# Altium PCB 1x9x1.PcbDoc (part 1 of 2)
Units mil, origin at the board's own origin, x right, y up, seen from the top; angles counter-clockwise.
Board outline 2200 x 5400 mil, 4 copper layers (Top Layer, Mid-Layer 1, Mid-Layer 2, Bottom Layer), stack 43.512 mil thick; 41 components, 51 nets, 356 pads, 603 vias.
Unrouted connection lines stored in the file: 1.
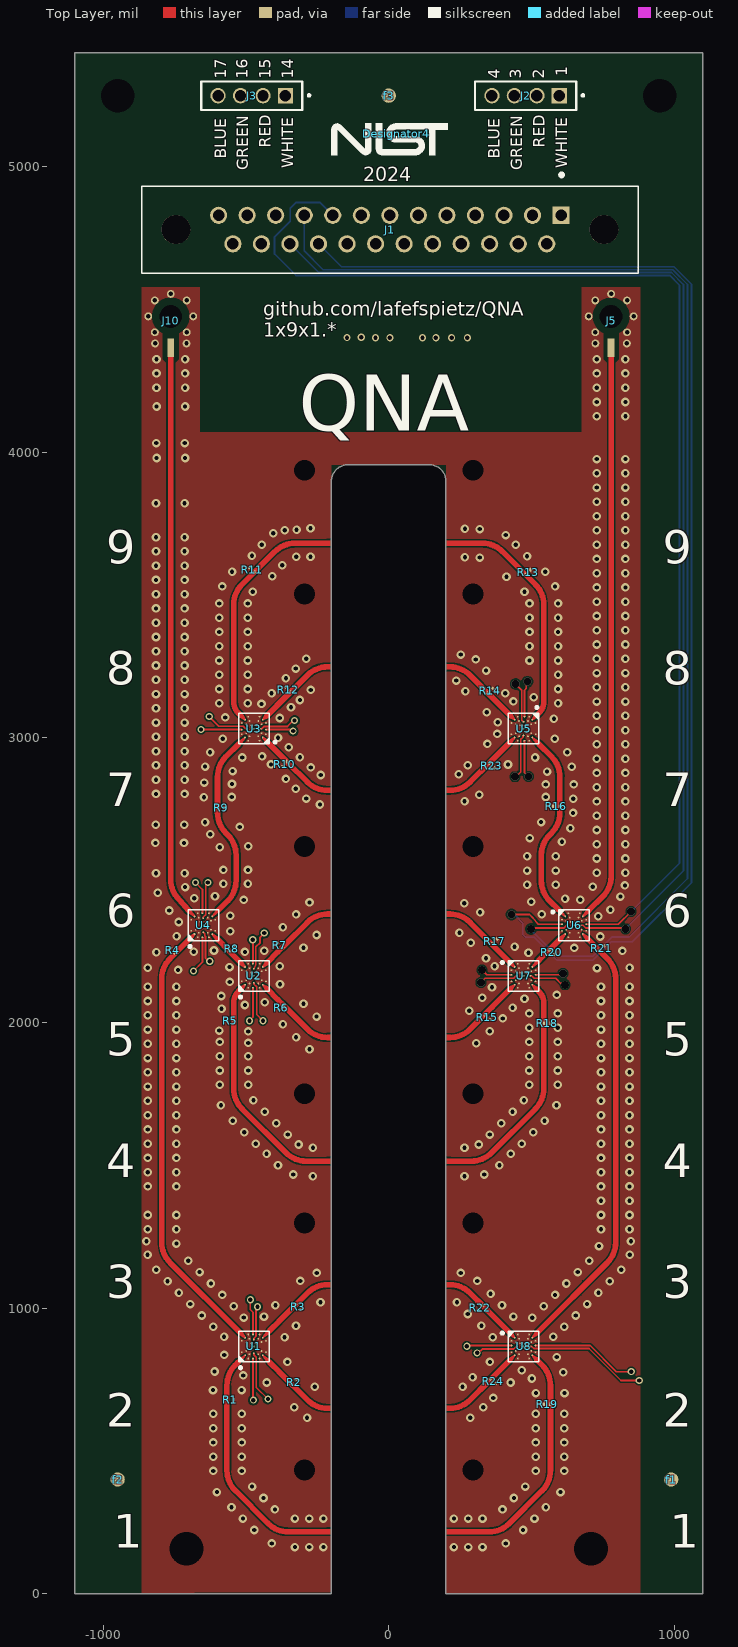
[diagram p0: Top Layer view]
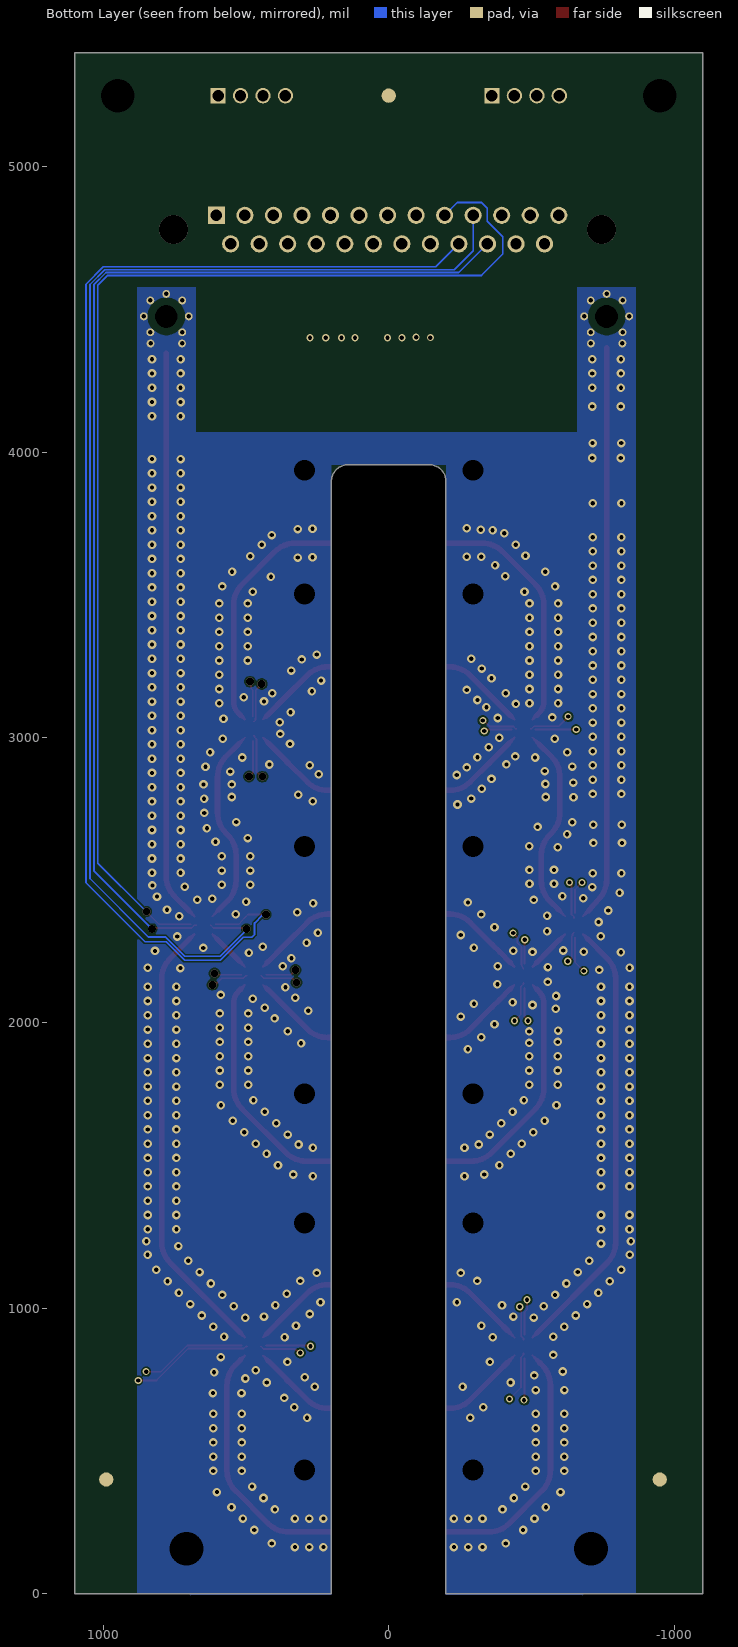
[diagram p1: Bottom Layer view, seen from below]
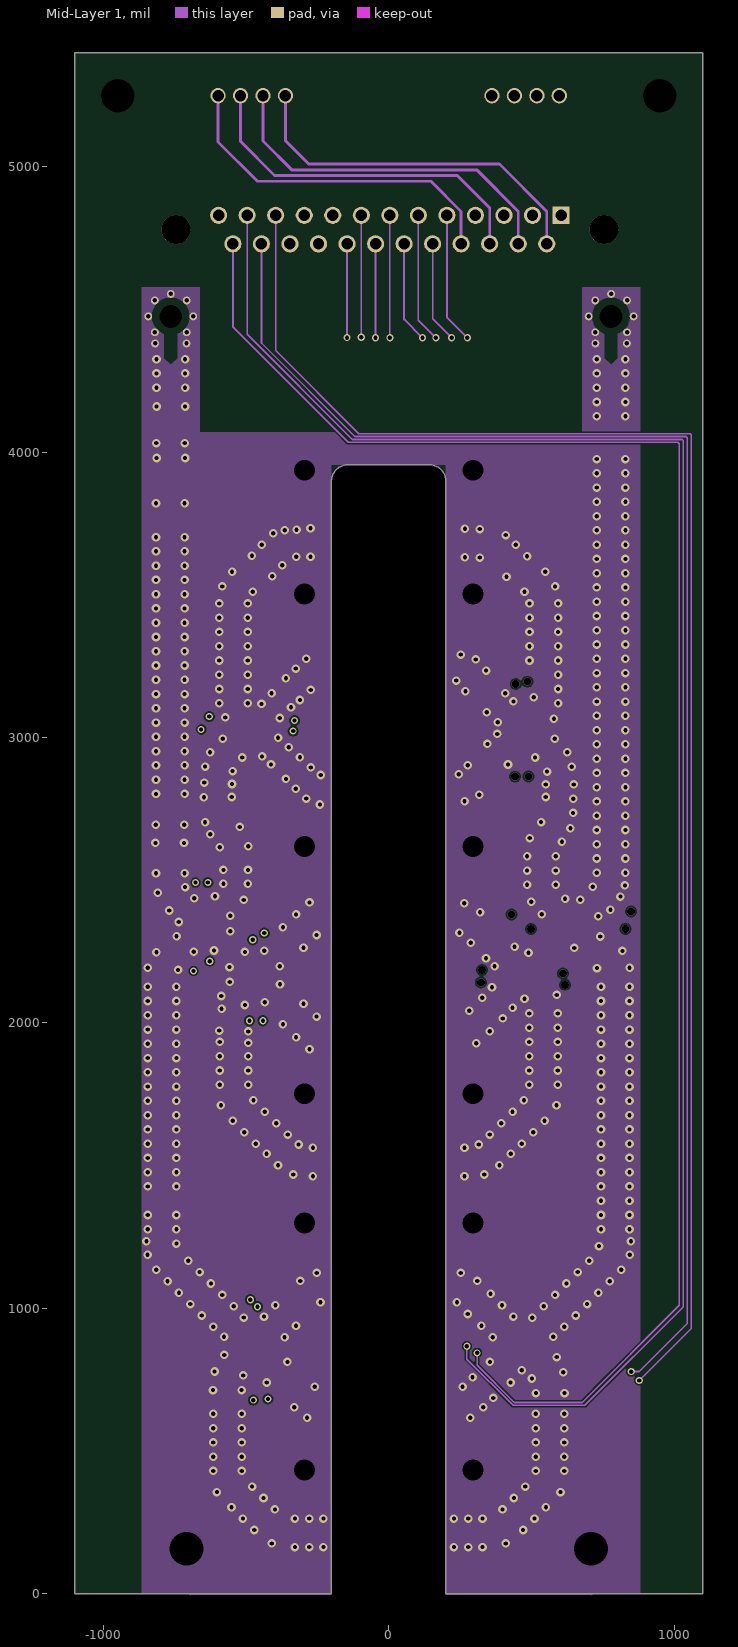
[diagram p2: Mid-Layer 1]
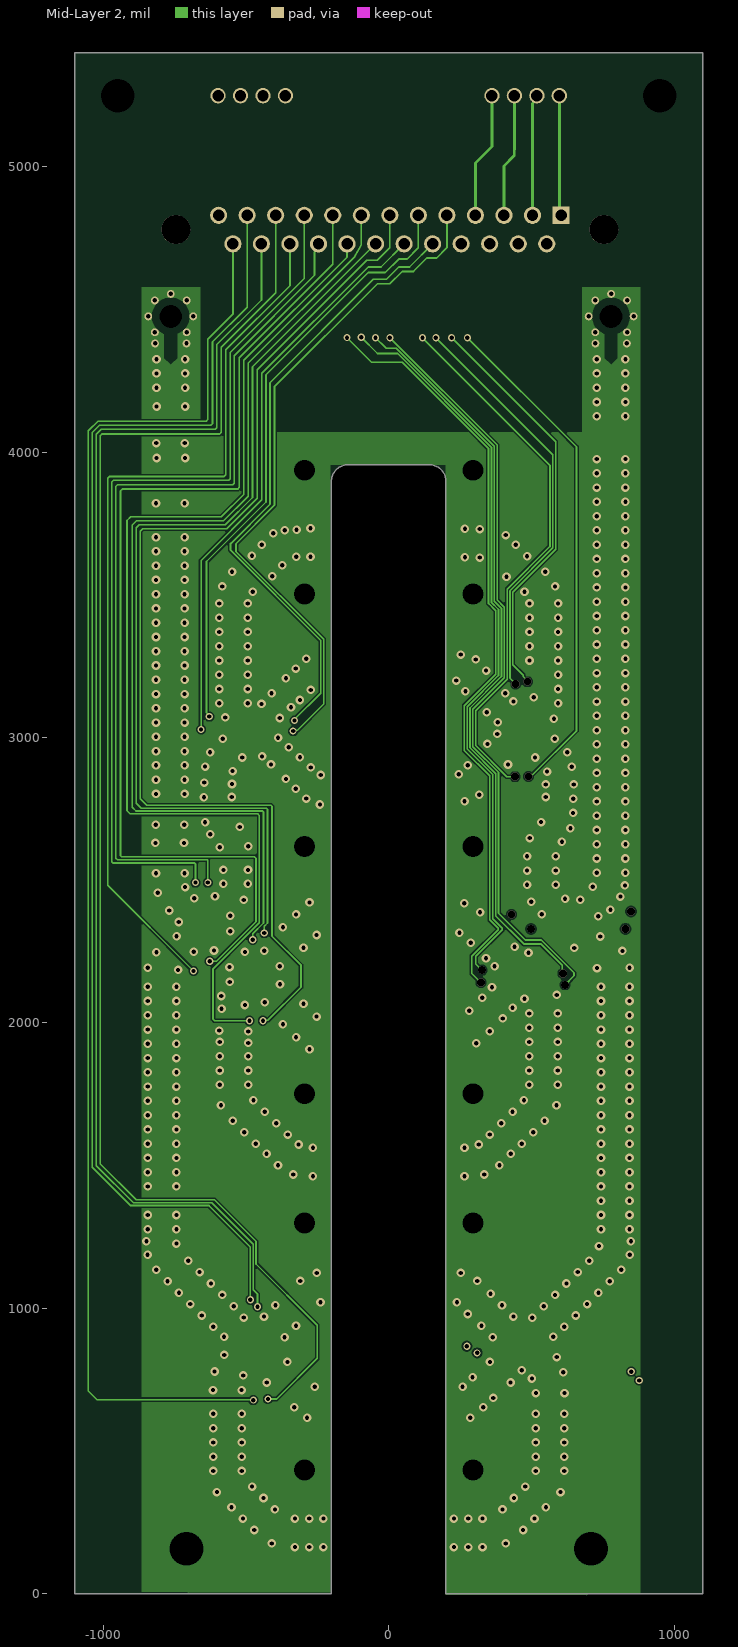
[diagram p3: Mid-Layer 2]

## Layer stack, top to bottom
Top Solder: solder mask 1, SM-001, Dk 4
Top Layer: signal copper 1.378
Core1: dielectric 10, RO4350B, Dk 3.48
Mid-Layer 1: signal copper 1.378
Dielectric 1: prepreg 7, PR7628, Dk 4.24
Dielectric 2: prepreg 4, PR2116, Dk 4.17
Dielectric 3: prepreg 7, PR7628, Dk 4.24
Mid-Layer 2: signal copper 1.378
Core2: dielectric 10, RO-4350B, Dk 3.48
Bottom Layer: signal copper 1.378
Bottom Solder: solder mask 1, SM-001, Dk 4

## Board outline
-1100,0 -1100,5400 1100,5400 1100,0 200.79,0 200.79,3897.64 ccw(c141.73,3897.64) 141.73,3956.69 -141.73,3956.69 ccw(c-141.73,3897.64) -200.79,3897.64 -200.79,0

## Design rules (kind name [scope] priority, off if disabled: settings)
Clearance [All] p1: gap=10 ignorepadtopadclearanceinfootprint=FALSE except(3.74: Track-Region SMDPad-Region Region-Region; 3.94: Track-Track Track-SMDPad; 4: Track-Fill; 6: Arc-SMDPad Arc-THPad Arc-Poly Track-Poly SMDPad-SMDPad SMDPad-Poly THPad-Poly Via-Poly Fill-Poly Poly-Poly Poly-Region Poly-Hole)
HoleSize [All] p1: absolutevalues=TRUE maxlimit=250 minlimit=1 maxpercent=80.000 minpercent=20.000
PolygonConnect [All] p1: connectstyle=Direct reliefconductorwidth=10 reliefentries=4 polygonreliefangle="90 Angle" airgapwidth=10
RoutingCorners [All] p1: cornerstyle=45-Degree minsetback=196.85 maxsetback=196.85
RoutingVias [All] p1: holewidth=15 width=25 viastyle="Through Hole" minholewidth=5 minwidth=10 maxholewidth=28 maxwidth=50
SolderMaskExpansion [All] p1: expansion=4 istentingtop=FALSE
Width [All] p1 off: maxlimit=21.65 minlimit=3.94 preferedwidth=10 toplayer_prefwidth=6 midlayer1_minwidth=10 midlayer1_maxwidth=10 midlayer2_minwidth=10 midlayer2_maxwidth=10 bottomlayer_minwidth=10 bottomlayer_maxwidth=10 minimp=50.000000 maximp=50.000000 favimp=50.000000
Width cpw-Z-1 [All] p2 off: maxlimit=19.68 minlimit=6.87 preferedwidth=10 toplayer_minwidth=12.7 toplayer_prefwidth=15.98 impedanceprofiledriven=TRUE impedanceprofileid={FF6547F1-1ACB-4B88-A69B-03F59FE56022} minimp=50.000000 maximp=50.000000 favimp=50.000000
28 further rules are at their usual default settings.

## Classes and differential pairs
component class 1x9x1: J1 J2 J3
component class 1x9x1_3: J5 R13 R14 R15 R16 R17 R18 R19 R20 R21 R22 R23 R24 U5 U6 U7 U8
component class 1x9x1_2: f1 f2 f3 J10 R1 R2 R3 R4 R5 R6 R7 R8 R9 R10 R11 R12 U1 U2 U3 U4

## Components (designator, comment, footprint, x,y, rotation, side; value= is the part's Value field where it differs from the comment)
Designator4 "Comment" "NIST logo - TopOverlay" 26.37,5117.13 r0 top
f1 "Fiducial" fiducial#1 1015,405 r0 top
f2 "Fiducial" fiducial#2 -950,400 r90 top
f3 "Fiducial" fiducial#2 0,5250 r0 top
J1 "M83513/25-D01CP" BEL_M83513/25-D01CP 3.94,4780.71 r0 top
J2 "2mm-header" 2mm-header 480,5250 r180 top
J3 "2mm-header" 2mm-header -480,5250 r180 top
J5 "85305-0232" MOLEX_85305-0232 779.53,4476.38 r0 top
J10 "85305-0232" MOLEX_85305-0232 -763.78,4476.38 r0 top
R1 "TE connectivity CPF0201B56K2E1" 0201-resistor -554.81,680 r180 top value=56k
R2 "TE connectivity CPF0201B56K2E1" 0201-resistor -331.35,741.65 r45 top value=56k
R3 "TE connectivity CPF0201B56K2E1" 0201-resistor -316.35,1005.35 r135 top value=56k
R4 "TE connectivity CPF0201B56K2E1" 0201-resistor -757,2254 r315 top value=56k
R5 "TE connectivity CPF0201B56K2E1" 0201-resistor -555.19,2007 r0 top value=56k
R6 "TE connectivity CPF0201B56K2E1" 0201-resistor -376.65,2053.35 r45 top value=56k
R7 "TE connectivity CPF0201B56K2E1" 0201-resistor -381.65,2271.65 r135 top value=56k
R8 "TE connectivity CPF0201B56K2E1" 0201-resistor -550.35,2260.65 r45 top value=56k
R9 "TE connectivity CPF0201B56K2E1" 0201-resistor -586.81,2755 r0 top value=56k
R10 "TE connectivity CPF0201B56K2E1" 0201-resistor -364.53,2906.88 r45 top value=56k
R11 "TE connectivity CPF0201B56K2E1" 0201-resistor -479,3588 r315 top value=56k
R12 "TE connectivity CPF0201B56K2E1" 0201-resistor -352.65,3168.65 r135 top value=56k
R13 "TE connectivity CPF0201B56K2E1" 0201-resistor 489,3580 r225 top value=56k
R14 "TE connectivity CPF0201B56K2E1" 0201-resistor 356.65,3163.65 r45 top value=56k
R15 "TE connectivity CPF0201B56K2E1" 0201-resistor 346,2020 r315 top value=56k
R16 "TE connectivity CPF0201B56K2E1" 0201-resistor 588,2760 r0 top value=56k
R17 "TE connectivity CPF0201B56K2E1" 0201-resistor 371.57,2286.43 r225 top value=56k
R18 "TE connectivity CPF0201B56K2E1" 0201-resistor 556.19,1999 r180 top value=56k
R19 "TE connectivity CPF0201B56K2E1" 0201-resistor 554.81,664 r0 top value=56k
R20 "TE connectivity CPF0201B56K2E1" 0201-resistor 571.34,2247.55 r315 top value=56k
R21 "TE connectivity CPF0201B56K2E1" 0201-resistor 746,2262 r45 top value=56k
R22 "TE connectivity CPF0201B56K2E1" 0201-resistor 321.35,1002.35 r45 top value=56k
R23 "TE connectivity CPF0201B56K2E1" 0201-resistor 362,2902 r135 top value=56k
R24 "TE connectivity CPF0201B56K2E1" 0201-resistor 366.14,744.09 r135 top value=56k
U1 "MM5130*" MM5130-NORM_PCB_NOFLOOD -472.44,866.14 r90 top
U2 "MM5130*" MM5130-NORM_PCB_NOFLOOD -472.44,2165.35 r90 top
U3 "MM5130*" MM5130-NORM_PCB_NOFLOOD -472.44,3031.5 r180 top
U4 "MM5130*" MM5130-NORM_PCB_NOFLOOD -649.61,2342.52 r90 top
U5 "MM5130*" MM5130-NORM_PCB_NOFLOOD 472.44,3031.5 r270 top
U6 "MM5130*" MM5130-NORM_PCB_NOFLOOD 649.61,2342.52 r0 top
U7 "MM5130*" MM5130-NORM_PCB_NOFLOOD 472.44,2165.35 r0 top
U8 "MM5130*" MM5130-NORM_PCB_NOFLOOD 472.44,866.14 r0 top

## Footprints (in the part's own frame and the unit in brackets; to place one, negate y for a bottom-side part, rotate by r counter-clockwise, add the part's x,y. Pads: shape width x height; smd on the part's side, far side on the other; paste and mask are expansions set on the pad)
2mm-header [mm]
  rect 1.37x1.37 / inner round 1.37 / far side rect 1.37x1.37 hole 1.02: 01(-3,0)
  round 1.37 hole 1.02: 02(-1,0) 03(1,0) 04(3,0)
  silkscreen extent -5.2,-1.27 4.5,1.27, body extent -4.34,-1.61 4.34,1.61, height 7.15
0201-resistor [mm]
  rect 0.25x0.3 smd: 1(-0.3,0) 2(0.3,0)
BEL_M83513/25-D01CP [mm]
  rect 1.53x1.53 hole 1.02: 1(15.24,1.27)
  round 1.53 hole 1.02: 2(12.7,1.27) 3(10.16,1.27) 4(7.62,1.27) 5(5.08,1.27) 6(2.54,1.27) 7(0,1.27) 8(-2.54,1.27) 9(-5.08,1.27) 10(-7.62,1.27) 11(-10.16,1.27) 12(-12.7,1.27) 13(-15.24,1.27) 14(13.97,-1.27) 15(11.43,-1.27) 16(8.89,-1.27) 17(6.35,-1.27) 18(3.81,-1.27) 19(1.27,-1.27) 20(-1.27,-1.27) 21(-3.81,-1.27) 22(-6.35,-1.27) 23(-8.89,-1.27) 24(-11.43,-1.27) 25(-13.97,-1.27)
  round 2.57 hole 2.57 unplated: ""(-19.05,0) ""(19.05,0)
  silkscreen extent -22.1,-3.88 22.1,5.01
fiducial#1 [mil]
  round 50 / inner round 0 / far side round 50 all layers, no hole paste-99999 mask+50: 1(-25,-5)
fiducial#2 [mil]
  round 50 / inner round 0 / far side round 50 all layers, no hole paste-99999 mask+50: 1(0,0)
MM5130-NORM_PCB_NOFLOOD [mm]
  round 0.15 smd mask+0.025: 1(-1.072,0.5) 2(-1.072,0.084) 3(-1.072,-0.5) 4(-0.786,-0.786) 5(-0.5,-1.072) 6(0.5,-1.072) 7(0.786,-0.786) 8(1.072,-0.5) 9(1.072,0.084) 10(1.072,0.5) 11(0.786,0.786) 12(0.5,1.072) 13(-0.5,1.072) 14(-0.786,0.786) 15(-0.681,0.396) 16(-0.615,0) 17(-0.681,-0.396) 18(-0.396,-0.681) 19(0.396,-0.681) 20(0.681,-0.396) 21(0.615,0) 22(0.681,0.396) 23(0.396,0.681) 24(-0.396,0.681) 25(-0.295,0.29) 26(-0.295,-0.29) 27(0.295,-0.29) 28(0.295,0.29) 29(0,0)
  silkscreen extent -1.99,-1.36 1.36,1.36, body extent -1.27,-1.27 1.27,1.27, height 0.98
MOLEX_85305-0232 [mm]
  rect 0.61x1.651 smd: 1(0,-2.775)
  round 0.7 hole 0.4 mask+0: gnd(-2,0) gnd(-1.414,-1.414) gnd(-1.414,1.414) gnd(-1.4,-2.41) gnd(0,2) gnd(1.4,-2.41) gnd(1.414,-1.414) gnd(1.414,1.414) gnd(2,0)
  body extent -2.5,-3.5 2.5,2.5, height 4.06
"NIST logo - TopOverlay" [mil]
  silkscreen extent -227,-76 181,35

## Part data
J1: "MIL-DTL-83513 PCB Mounted Connector", Package=None, Availability=Unavailable, MP=M83513/25-D01CP, Price=None
J2 J3: "<a href=\"https://pricing.snapeda.com/parts/TSW-104-07-G-S/Samtec/view-part?ref=eda\">Check availability</a>", Package=None, Availability=Unavailable, MP=altium_native_batch, Price=None
J5 J10: "SMP Connector Plug, Male Pin 50Ohm Surface Mount Solder", Package=None, Availability="In Stock", Check_prices=https://www.snapeda.com/parts/853050232/Molex/view-part/?ref=eda, MF=Molex, MP=853050232, Price=None, Purchase-URL=https://pricing.snapeda.com/search/part/853050232/?ref=eda, SnapEDA_Link=https://www.snapeda.com/parts/853050232/Molex/view-part/?ref=snap
R1 R2 R3 R4 R5 R6 R7 R8 R9 R10 R11 R12 R13 R14 R15 R16 R17 R18 R19 R20 R21 R22 R23 R24: "CPF 0201 56K2 0.1% 25PPM 1K RL", Mfgr Part No.=CPF0201B56K2E1, Package=None, Availability=Unavailable, Mfgr="TE connectivity", MP=ERJ1GN0R00C, Price=None
U1 U2 U3 U4 U5 U6 U7 U8: library part IC-MM5130, "High power SP4T MEMs switch"

## Free pads (board coordinates)
  round 60 hole 118.11: 9(-950,5250) 9(-708.66,157.48) 9(708.66,157.48) 9(950,5250)
  round 60 hole 73: 9(-295.28,433.07) 9(-295.28,1299.21) 9(-295.28,1751.97) 9(-295.28,2618.11) 9(-295.28,3503.94) 9(-295.28,3937.01) 9(295.28,433.07) 9(295.28,1299.21) 9(295.28,1751.97) 9(295.28,2618.11) 9(295.28,3503.94) 9(295.28,3937.01)
  round 0 hole 80 unplated: ""(-763.78,4476.38) ""(779.53,4476.38)

## Via types
v1: diameter 30, hole 15, Top Layer to Bottom Layer, 563 vias
v2: diameter 25, hole 15, Top Layer to Bottom Layer, 28 vias
v3: diameter 28, hole 28, Top Layer to Bottom Layer, 12 vias

## Nets (pads, with @x,y where several pads share a name; then routed paths per layer and width w, separated by ;. In a path a pad name is that pad's centre, name@x,y a point inside that pad or via, vN(x,y) a via of type N, cw(c..) or ccw(c..) an arc to the next point about the centre after c; other vN are vias at no path point)
GND: J5.gnd J10.gnd pad.9@295.28,433.07 pad.9@295.28,1299.21 pad.9@295.28,1751.97 pad.9@295.28,2618.11 pad.9@295.28,3503.94 pad.9@295.28,3937.01 pad.9@708.66,157.48 pad.9@-295.28,433.07 pad.9@-295.28,1299.21 pad.9@-295.28,1751.97 pad.9@-295.28,2618.11 pad.9@-295.28,3503.94 pad.9@-295.28,3937.01 pad.9@-708.66,157.48 pad.@-763.78,4476.38 R1.1 R2.2 R3.1 R4.1 R5.1 R6.1 R7.2 R8.2 R9.2 R10.1 R11.1 R12.2 R13.1 R14.2 R15.2 R16.1 R17.1 R18.1 R19.1 R20.2 R21.2 R22.1 R23.1 R24.1 U1.1 U1.3 U1.5 U1.6 U1.8 U1.10 U1.12 U1.13 U1.15 U1.17 U1.18 U1.19 U1.20 U1.22 U1.23 U1.24 U1.25 U1.26 U1.27 U1.28 U2.1 U2.3 U2.5 U2.6 U2.8 U2.10 U2.12 U2.13 U2.15 U2.17 U2.18 U2.19 U2.20 U2.22 U2.23 U2.24 U2.25 U2.26 U2.27 U2.28 U3.1 U3.3 U3.5 U3.6 U3.8 U3.10 U3.12 U3.13 U3.15 U3.17 U3.18 U3.19 U3.20 U3.22 U3.23 U3.24 U3.25 U3.26 U3.27 U3.28 U4.1 U4.3 U4.5 U4.6 U4.8 U4.10 U4.12 U4.13 U4.15 U4.17 U4.18 U4.19 U4.20 U4.22 U4.23 U4.24 U4.25 U4.26 U4.27 U4.28 U5.1 U5.3 U5.5 U5.6 U5.8 U5.10 U5.12 U5.13 U5.15 U5.17 U5.18 U5.19 U5.20 U5.22 U5.23 U5.24 U5.25 U5.26 U5.27 U5.28 U6.1 U6.3 U6.5 U6.6 U6.8 U6.10 U6.12 U6.13 U6.15 U6.17 U6.18 U6.19 U6.20 U6.22 U6.23 U6.24 U6.25 U6.26 U6.27 U6.28 U7.1 U7.3 U7.5 U7.6 U7.8 U7.10 U7.12 U7.13 U7.15 U7.17 U7.18 U7.19 U7.20 U7.22 U7.23 U7.24 U7.25 U7.26 U7.27 U7.28 U8.1 U8.3 U8.5 U8.6 U8.8 U8.10 U8.12 U8.13 U8.15 U8.17 U8.18 U8.19 U8.20 U8.22 U8.23 U8.24 U8.25 U8.26 U8.27 U8.28
  other v1: -328.68,163.07 -278.68,163.07 -228.68,163.07 228.68,163.07 278.68,163.07 328.68,163.07 -410,176 410,176 -471,223 471,223 -511,263 511,263 -328.68,263.07 -278.68,263.07 -228.68,263.07 228.68,263.07 278.68,263.07 328.68,263.07 -398.88,295.12 398.88,295.12 -551,303 551,303 -438.88,335.12 438.88,335.12 -602,356 602,356 -478.88,375.12 478.88,375.12 -615,430 -515,430 515,430 615,430 -615,480 -515,480 515,480 615,480 -615,530 -515,530 515,530 615,530 -615,580 -515,580 515,580 615,580 -286,616 286,616 -615,630 -515,630 515,630 615,630 -331,653 331,653 366,686 516,703 616,703 -615.75,713.39 -515.75,713.39 -258.88,725.12 258.88,725.12 -427,740 427,740 502,754 293.88,758.12 -509.84,764.76 612,776 -610.24,778.54 466,783 -354.88,812.12 354.88,812.12 589,829 -576.77,836.61 -364.88,898.88 364.88,898.88 -577,900 577,900 -615.12,934.88 615.12,934.88 -324.88,938.88 324.88,938.88 503,967 -507.87,967.52 -437,971 437,971 -655.12,974.88 655.12,974.88 277,980 -543,1007 543,1007 -397,1011 397,1011 -695.12,1014.88 695.12,1014.88 -239,1021 239,1021 -583,1047 583,1047 357,1051 -735.12,1054.88 735.12,1054.88 -623,1087 623,1087 -775.12,1094.88 775.12,1094.88 -310,1096 310,1096 -252,1124 252,1124 -663,1127 663,1127 -815.12,1134.88 815.12,1134.88 -703,1167 703,1167 -844.98,1187.23 844.98,1187.23 737,1218 -744,1227 -848.98,1235.23 848.98,1235.23 -844,1277 -744,1277 744,1277 844,1277 -844,1327 -744,1327 744,1327 844,1327 744,1377 844,1377 -844,1427 -744,1427 744,1427 844,1427 -265.68,1463.07 265.68,1463.07 -335,1469 335,1469 -844,1477 -744,1477 744,1477 844,1477 -388,1501 388,1501 -844,1527 -744,1527 744,1527 844,1527 -428,1542 428,1542 -265.68,1563.07 265.68,1563.07 -315.88,1574.12 315.88,1574.12 -844,1577 -744,1577 -466.12,1576.88 466.12,1576.88 744,1577 844,1577 -354,1609 354,1609 -506.12,1616.88 506.12,1616.88 -844,1627 -744,1627 744,1627 844,1627 -394,1649 394,1649 -546.12,1656.88 546.12,1656.88 -844,1677 -744,1677 744,1677 844,1677 -434,1689 434,1689 -588,1712 588,1712 -844,1727 -744,1727 744,1727 844,1727 -474,1729 474,1729 -844,1777 -744,1777 744,1777 844,1777 -592.31,1783.42 -492.31,1783.42 492.31,1783.42 592.31,1783.42 -844,1827 -744,1827 744,1827 844,1827 -592.31,1833.42 -492.31,1833.42 492.31,1833.42 592.31,1833.42 -844,1877 -744,1877 744,1877 844,1877 -592.31,1883.42 -492.31,1883.42 492.31,1883.42 592.31,1883.42 -277.68,1908.33 -844,1927 -744,1927 744,1927 844,1927 307,1929 -492.13,1930.12 -592.31,1933.42 492.31,1933.42 592.31,1933.42 -324.8,1950.21 -492.13,1970.47 354.12,1970.88 -593.5,1973.43 -844,1977 -744,1977 744,1977 844,1977 492.31,1983.42 592.31,1983.42 -370.8,1995.21 400.12,2015.88 -252.68,2022.33 -844,2027 -744,2027 744,2027 844,2027 492.31,2033.42 592.31,2033.42 282,2043 -585.63,2050.2 434.12,2052.88 -503.94,2062.99 -298.68,2067.33 -434.06,2072.83 -844,2077 -744,2077 744,2077 844,2077 476.01,2085.37 328,2088 -586.61,2094.49 589.01,2098.37 362,2125 -844,2127 -744,2127 744,2127 844,2127 -380.91,2135.83 -557.09,2143.7 -738.19,2186.02 730.01,2192.37 -844.01,2193.37 844.01,2193.37 -558.07,2195.87 -381.89,2198.82 371,2199 341,2227 490,2246 -813.98,2248.03 -503.94,2249.02 -683.45,2249.44 -436.02,2252.95 819.01,2252.37 -612.2,2253.94 650,2263 -298.68,2263.38 441,2267 288,2281 741,2303 -743.49,2303.57 -252.68,2308.38 248,2316 -555.12,2321.85 -370.8,2335.5 -735.62,2353.77 734,2374 -555.12,2375.98 -324.8,2380.5 536,2381 320.12,2388.12 -769.08,2394.12 777,2397 265,2420 -277.68,2422.38 500,2425 -507.87,2431.1 671,2432 618,2435 -681.57,2436.81 812,2443 -608.74,2443.7 -809.06,2456.69 -713.58,2476.38 715,2477 828,2482 485,2484 585,2484 -579.21,2487.99 -493.5,2488.19 -815.55,2524.8 -715.55,2524.8 729.53,2526.38 829.53,2526.38 485,2534 585,2534 -579.21,2536.22 -493.11,2536.42 729.53,2576.38 829.53,2576.38 485,2584 585,2584 -592.52,2616.14 -492.13,2619.09 729.53,2626.38 829.53,2626.38 -817.52,2630.91 -717.52,2630.91 607,2635 494,2648 -625,2661.42 729.53,2676.38 829.53,2676.38 637,2682 -521.65,2687.01 -816.54,2695.08 -716.54,2695.08 -643.7,2703.74 534,2704 729.53,2726.38 829.53,2726.38 646,2736 -241.14,2765.75 266,2777 729.53,2776.38 829.53,2776.38 647,2786 -289.37,2786.42 -647.64,2791.34 -550,2792 550,2792 317.12,2799.88 -815.55,2802.76 -715.55,2802.76 -325.79,2820.87 729.53,2826.38 829.53,2826.38 550,2836 649,2836 -549.21,2837.6 -646.65,2842.52 -815.55,2852.76 -715.55,2852.76 -360.24,2855.32 -238.19,2869.09 245,2872 729.53,2876.38 829.53,2876.38 555,2881 -547.24,2882.87 -273.62,2895.67 642,2898 -643.7,2898.62 -815.55,2902.76 -715.55,2902.76 277,2903 418.12,2905.88 -412.57,2906.23 729.53,2926.38 829.53,2926.38 -513.01,2930.37 513.01,2930.37 -311.02,2931.1 -443.9,2934.06 -626.01,2948.37 626.01,2948.37 -815.55,2952.76 -715.55,2952.76 -350.39,2966.54 729.53,2976.38 829.53,2976.38 346,2978 -582.01,2996.37 582.01,2996.37 -387.8,3000 -815.55,3002.76 -715.55,3002.76 380,3013 729.53,3026.38 829.53,3026.38 -815.55,3052.76 -715.55,3052.76 382,3054 579,3066 -381.89,3068.9 -572.83,3070.87 729.53,3076.38 829.53,3076.38 344,3089 -815.55,3102.76 -715.55,3102.76 -342.52,3106.3 -445.87,3118.11 -593.53,3120.38 -493.53,3120.38 593.53,3120.38 437,3127 729.53,3126.38 829.53,3126.38 -311.02,3131.89 507.87,3141.73 -815.55,3152.76 -715.55,3152.76 -410.43,3155.51 408,3156 269,3163 -273.62,3167.32 -593.53,3170.38 -493.53,3170.38 593.53,3170.38 729.53,3176.38 829.53,3176.38 237,3200 -815.55,3202.76 -715.55,3202.76 -360.24,3207.68 -593.53,3220.38 -493.53,3220.38 593.53,3220.38 729.53,3226.38 829.53,3226.38 341.12,3235.12 -325.79,3242.13 -815.55,3252.76 -715.55,3252.76 -593.53,3270.38 -493.53,3270.38 493.53,3270.38 593.53,3270.38 305.12,3274.12 -289.37,3276.57 729.53,3276.38 829.53,3276.38 252.22,3291.09 -815.55,3302.76 -715.55,3302.76 -593.53,3320.38 -493.53,3320.38 493.53,3320.38 593.53,3320.38 729.53,3326.38 829.53,3326.38 -815.55,3352.76 -715.55,3352.76 -593.53,3370.38 -493.53,3370.38 493.53,3370.38 593.53,3370.38 729.53,3376.38 829.53,3376.38 -815.55,3402.76 -715.55,3402.76 -593.53,3420.38 -493.53,3420.38 493.53,3420.38 593.53,3420.38 729.53,3426.38 829.53,3426.38 -815.55,3452.76 -715.55,3452.76 -593.53,3470.38 -493.53,3470.38 493.53,3470.38 593.53,3470.38 729.53,3476.38 829.53,3476.38 -815.55,3502.76 -715.55,3502.76 -476,3511 476,3511 729.53,3526.38 829.53,3526.38 -583,3530 583,3530 -815.55,3552.76 -715.55,3552.76 412.88,3563.88 -408.46,3565.94 729.53,3576.38 829.53,3576.38 -549,3581 549,3581 -815.55,3602.76 -715.55,3602.76 -372.88,3603.88 729.53,3626.38 829.53,3626.38 319,3631 267,3632 -324,3634 -274,3634 485,3636 -479.33,3637.8 -815.55,3652.76 -715.55,3652.76 -445,3676 445,3676 729.53,3676.38 829.53,3676.38 -815.55,3702.76 -715.55,3702.76 410,3710 -405,3716 -364,3727 729.53,3726.38 829.53,3726.38 -323,3729 319,3731 267,3732 -274,3734 729.53,3776.38 829.53,3776.38 -815.55,3821.85 -715.55,3821.85 729.53,3826.38 829.53,3826.38 729.53,3876.38 829.53,3876.38 729.53,3926.38 829.53,3926.38 729.53,3976.38 829.53,3976.38 -813.58,3980.12 -713.58,3980.12 -814.57,4032.48 -714.57,4032.48 729.53,4126.38 829.53,4126.38 -813.58,4160.43 -713.58,4160.43 729.53,4176.38 829.53,4176.38 -813.78,4226.38 -713.78,4226.38 729.53,4226.38 829.53,4226.38 -813.78,4276.38 -713.78,4276.38 729.53,4276.38 829.53,4276.38 -813.78,4326.38 -713.78,4326.38 729.53,4326.38 829.53,4326.38
NetJ1_1: J1.1 J2.01 | length 421.7
  Mid-Layer 2 w10: J2.01@598.11,5250 598.11,4836.54 J1.1@603.94,4830.71
NetJ1_2: J1.2 J2.02 | length 425.7
  Mid-Layer 2 w10: J1.2@503.94,4830.71 503.94,5222.68 519.37,5238.11 J2.02@519.37,5250
NetJ1_3: J1.3 J2.03 | length 434.5
  Mid-Layer 2 w10: J1.3@403.94,4830.71 403.94,5003.94 440,5040 440,5060 440.63,5060.63 J2.03@440.63,5250
NetJ1_4: J1.4 J2.04 | length 443.3
  Mid-Layer 2 w10: J1.4@303.94,4830.71 303.94,5013.94 361.89,5071.89 J2.04@361.89,5250
NetJ1_5: J1.5 U3.2 U5.9 | length 4819.7
  Top Layer w6: U3.2@-430.24,3028.19 -347.96,3028.19 -346.4,3026.64 -338.58,3026.64 v2(-334.94,3023) ; U5.9@475.75,2989.29 475.75,2877.3 489.05,2864 v3(490,2864)
  Mid-Layer 1 w6: J1.5@203.94,4830.71 203.94,4473.23 v2(275.59,4401.57)
  Mid-Layer 2 w6: v2(-334.94,3023) -331.71,3026.23 -319.77,3026.23 -228.06,3117.94 -228.06,3344.48 -535.42,3651.84 -535.42,3679.12 -400.59,3813.95 -400.59,4229.41 -39.45,4590.55 3.94,4590.55 47.24,4633.86 86.61,4633.86 133.86,4681.1 168.14,4681.1 203.94,4716.9 J1.5@203.94,4830.71 ; v2(275.59,4401.57) 658.46,4018.7 658.46,3024.61 504.19,2870.33 502.29,2870.33 495.95,2864 v3(490,2864)
NetJ1_6: J1.6 U3.21 U5.16 | length 4322.6
  Top Layer w6: v2(-628.94,3073.82) -595.41,3040.29 -509.27,3040.29 -500.48,3031.5 U3.21@-496.65,3031.5 ; v3(445.12,3187.88) 445.12,3186.88 466.06,3165.94 466.06,3078.07 465.81,3077.82 465.81,3069.58 466.74,3068.66 466.74,3061.41 U5.16@472.44,3055.71
  Mid-Layer 1 w6: J1.6@103.94,4830.71 103.94,4462.99 v2(165.35,4401.57)
  Mid-Layer 2 w6: v2(-628.94,3073.82) -628.94,3077.33 -638.78,3087.18 -638.78,3617.13 -430.12,3825.79 -430.12,4271.65 -71.85,4629.92 -11.81,4629.92 35.43,4677.17 64.2,4677.17 103.94,4716.9 J1.6@103.94,4830.71 ; v2(165.35,4401.57) 575,3991.93 575,3665 425,3515 425,3208 v3(445.12,3187.88)
NetJ1_7: J1.7 U2.16 U7.21 | length 7314.4
  Top Layer w6: U2.16@-472.44,2141.14 -472.44,2136.72 -462.65,2126.93 -462.65,2119.05 -462.6,2119.01 -462.6,2029.53 v2(-440.94,2007.87) ; U7.21@496.65,2165.35 500.65,2165.35 509.47,2156.53 585.47,2156.53 603.93,2138.07 613.9,2138.07 v3(618.11,2133.86)
  Mid-Layer 1 w6: v2(3.94,4401.57) J1.7@3.94,4830.71
  Mid-Layer 2 w6: v2(-440.94,2007.87) -439.37,2009.45 -423.63,2009.45 -307.09,2125.98 -307.09,2201.77 -409.15,2303.84 -409.15,2759.06 -412.67,2762.57 -847.93,2762.57 -870.75,2785.39 -870.75,3723.47 -862.35,3731.87 -567.34,3731.87 -460.63,3838.58 -460.63,4289.37 -76.77,4673.23 -39.74,4673.23 3.94,4716.9 J1.7@3.94,4830.71 ; v2(3.94,4401.57) 379.94,4025.57 379.94,3482.22 405,3457.16 405,3210 294.81,3099.81 294.81,2968.29 385,2878.11 385,2385 479,2291 534,2291 649.61,2175.39 649.61,2165.35 v3(618.11,2133.86)
NetJ1_8: J1.8 U2.9 U7.2 | length 6736.9
  Top Layer w6: v2(-476.69,2291.65) -475.75,2290.71 -475.75,2265.47 U2.9@-475.75,2207.56 ; v3(326.77,2185.04) 343.15,2168.66 U7.2@430.24,2168.66
  Mid-Layer 1 w6: v2(-96.06,4403.15) J1.8@-96.06,4830.71
  Mid-Layer 2 w6: v2(-476.69,2291.65) -476.38,2291.97 -476.38,2312.99 -438.98,2350.39 -438.98,2739.18 -442.49,2742.7 -885.46,2742.7 -898.62,2755.86 -898.62,3745.13 -884,3759.75 -578.88,3759.75 -492.13,3846.51 -492.13,4312.87 -121.38,4683.62 -96.06,4726.77 J1.8@-96.06,4830.71 ; v2(-96.06,4403.15) -39.12,4346.2 31.2,4346.2 360,4017.41 360,3474.05 385,3449.05 385,3218.11 274.94,3108.04 274.94,2960.06 364.42,2870.58 364.42,2365.58 398.01,2331.99 398.01,2327.01 305.28,2234.28 305.28,2206.54 v3(326.77,2185.04)
NetJ1_9: J1.9 U4.16 U6.9 | length 8088.4
  Top Layer w6: U4.16@-649.61,2318.31 -644.41,2313.12 -644.41,2305.53 -642,2303.11 -642,2227.38 -631.15,2216.54 v2(-627.41,2216.54) ; U6.9@691.81,2345.83 804.81,2345.83 v3(849.49,2390.51)
  Mid-Layer 2 w6: v2(-627.41,2216.54) -603.46,2216.54 -465,2355 -465,2576.69 -471.03,2582.72 -936.45,2582.72 -939.96,2586.24 -939.96,3865.21 -934.1,3871.06 -529.48,3871.06 -523.62,3876.92 -523.62,4331.38 -196.06,4658.94 J1.9@-196.06,4830.71
  Bottom Layer w6: J1.9@-196.06,4830.71 -241.18,4875.83 -324.17,4875.83 -345,4855 -345,4810 -400,4755 -400,4695 -325,4620 985,4620 1019.21,4585.79 1019.21,2560.22 v3(849.49,2390.51)
NetJ1_10: J1.10 U4.9 U6.16 | length 7693.8
  Top Layer w6: v2(-677.17,2492.13) -652.91,2467.87 U4.9@-652.91,2384.72 ; v3(499,2329) 502.72,2332.72 614.01,2332.72 615.77,2334.48 623.8,2342.52 U6.16@625.39,2342.52
  Mid-Layer 2 w6: v2(-677.17,2492.13) -677.17,2557.46 -680.68,2560.98 -966.8,2560.98 -970.31,2564.49 -970.31,3895.72 -964.46,3901.57 -560.98,3901.57 -555.12,3907.43 -555.12,4349.88 -296.06,4608.94 J1.10@-296.06,4830.71
  Bottom Layer w6: J1.10@-296.06,4830.71 -296.06,4706.06 -230.06,4640.06 994.94,4640.06 1047.09,4587.91 1047.09,2506.07 842.01,2301 782,2301 714.94,2233.94 590.12,2233.94 499,2325.05 v3(499,2329)
NetJ1_11: J1.11 U1.16 U8.21 | length 11263.3
  Top Layer w6: U1.16@-472.44,841.93 -472.44,837.51 -463.81,828.88 -463.81,722.67 v2(-423.23,682.09) ; U8.21@496.65,866.14 500.86,866.14 508,859 702.11,859 814.06,747.05 v2(877.95,747.05)
  Mid-Layer 1 w6: J1.11@-396.06,4830.71 -396.06,4356.69 -104.37,4065 1056.49,4065 1060,4061.49 1060,929.09 v2(877.95,747.05)
  Mid-Layer 2 w6: v2(-423.23,682.09) -392.91,682.09 -250,825 -250,940 -465.13,1155.13 -465.13,1234.55 -610.58,1380 -884.92,1380 -1010.83,1505.91 -1010.83,4058.12 -1004.97,4063.98 -592.47,4063.98 -586.61,4069.83 -586.61,4368.39 -525.86,4429.14 -396.06,4558.94 J1.11@-396.06,4830.71
NetJ1_12: J1.12 U1.9 U8.2 | length 11076.7
  Top Layer w6: v2(-485,1030) -485.69,995.69 -475.75,985.75 U1.9@-475.75,908.35 ; v2(274,867) 276.45,869.45 U8.2@430.24,869.45
  Mid-Layer 1 w6: J1.12@-496.06,4830.71 -496.06,4413.36 -127.83,4045.13 1028.61,4045.13 1032.13,4041.61 1032.13,1004.57 687.56,660 435.95,660 274,821.95 v2(274,867)
  Mid-Layer 2 w6: J1.12@-496.06,4830.71 -496.06,4508.94 -617.69,4387.31 -617.69,4100.5 -623.55,4094.65 -1013.72,4094.65 -1038.7,4069.66 -1038.7,1494.36 -904.34,1360 -630,1360 -485,1215 v2(-485,1030)
NetJ1_14: J1.14 J3.01 | length 1290.2
  Mid-Layer 1 w10: J3.01@-361.89,5250 -361.89,5091.89 -280,5010 388.45,5010 553.94,4844.52 J1.14@553.94,4730.71
NetJ1_15: J1.15 J3.02 | length 1269.7
  Mid-Layer 1 w10: J3.02@-440.63,5250 -440.63,5090.63 -340,4990 308.45,4990 453.94,4844.52 J1.15@453.94,4730.71
NetJ1_16: J1.16 J3.03 | length 1256.5
  Mid-Layer 1 w10: J3.03@-519.37,5250 -520,5249.37 -520,5090 -400,4970 240,4970 353.94,4856.06 J1.16@353.94,4730.71
NetJ1_17: J1.17 J3.04 | length 1228.6
  Mid-Layer 1 w10: J3.04@-598.11,5250 -598.11,5088.11 -460,4950 148.45,4950 253.94,4844.52 J1.17@253.94,4730.71
NetJ1_18: J1.18 U3.16 U5.2 | length 4234.9
  Top Layer w6: U3.16@-448.23,3031.5 -444.41,3031.5 -436.53,3039.37 -354.63,3039.37 -334,3060 v2(-330,3060) ; U5.2@475.75,3073.7 476,3073.95 476,3166.47 482.53,3173 482.53,3192.53 v3(486,3196)
  Mid-Layer 1 w6: J1.18@153.94,4730.71 153.94,4468.11 v2(220.47,4401.57)
  Mid-Layer 2 w6: v2(-330,3060) -330,3064.06 -238,3156.06 -238,3340.36 -554.13,3656.5 -554.13,3680.12 -416.18,3818.07 -416.18,4243.82 -53.7,4606.3 -7.87,4606.3 35.43,4649.61 72.83,4649.61 J1.18@153.94,4730.71 ; v2(220.47,4401.57) 585,4037.05 585,3660 435,3510 435,3255 471.62,3218.38 471.62,3214.14 486,3199.76 v3(486,3196)
NetJ1_19: J1.19 U3.9 U5.21 | length 4585.2
  Top Layer w6: v2(-657.48,3028.54) -622.5,3028.54 -622.15,3028.19 U3.9@-514.65,3028.19 ; v3(443,2863) 446.23,2863 463,2879.77 463,2994 470.41,3001.41 470.41,3005.25 U5.21@472.44,3007.28
  Mid-Layer 1 w6: J1.19@53.94,4730.71 53.94,4465.75 v2(118.11,4401.57)
  Mid-Layer 2 w6: v2(-657.48,3028.54) -657.48,3621.06 -444.88,3833.66 -444.88,4274.61 ; -444.88,4275.12 -444.88,4276.6 -71.88,4649.61 -27.17,4649.61 J1.19@53.94,4730.71 ; v2(118.11,4401.57) 565,3954.68 565,3670 415,3520 415,3205 304.75,3094.75 304.75,2972.41 414.16,2863 v3(443,2863)
NetJ1_20: J1.20 U2.21 U7.9 | length 6602.6
  Top Layer w6: U2.21@-472.44,2189.57 -465.59,2203.91 -465.59,2266.7 -450.79,2281.5 -450.79,2300.2 v2(-436.02,2314.96) ; U7.9@514.65,2168.66 v3@610.24,2168.66
  Mid-Layer 1 w6: v2(-46.06,4401.57) J1.20@-46.06,4730.71
  Mid-Layer 2 w6: v2(-436.02,2314.96) -436.02,2339.29 -425.04,2350.28 -425.04,2749.12 -428.55,2752.64 -866.7,2752.64 -884.68,2770.62 -884.68,3735.28 -874.16,3745.81 -573.11,3745.81 -477.36,3841.56 -477.36,4299.41 J1.20@-46.06,4730.71 ; v2(-46.06,4401.57) -9.22,4364.73 26.73,4364.73 370,4021.46 370,3478.11 395,3453.11 395,3214.05 284.87,3103.93 284.87,2964.18 375,2874.05 375,2375 472.94,2277.06 532.94,2277.06 608,2202 608,2175.47 v3(610.24,2173.23)
NetJ1_21: J1.21 U2.2 U7.16 | length 7139.4
  Top Layer w6: v2(-488.19,2007.87) -488.19,2008.43 -475.75,2020.87 U2.2@-475.75,2123.15 ; v3(322.83,2141.73) 337.63,2156.53 437.81,2156.53 446.64,2165.35 U7.16@448.23,2165.35
  Mid-Layer 1 w6: v2(-146.06,4401.97) J1.21@-146.06,4730.71
  Mid-Layer 2 w6: v2(-488.19,2007.87) -610.28,2007.87 -616.14,2013.73 -616.14,2188.86 -453.58,2351.42 -453.58,2727.25 -459.09,2732.76 -906.46,2732.76 -917.32,2743.62 -917.32,3760.87 -904.51,3773.69 -586.55,3773.69 -507.87,3852.36 -507.87,4322.13 -146.06,4683.94 J1.21@-146.06,4730.71 ; v2(-146.06,4401.97) -60.09,4316 47,4316 350,4013 350,3470 375.06,3444.94 375.06,3222.22 265,3112.16 265,2955 353.83,2866.17 353.83,2361.17 383.49,2331.51 383.49,2326.54 291.34,2234.39 291.34,2173.23 v3@319.82,2144.75
NetJ1_22: J1.22 U4.21 U6.2 | length 7708.6
  Top Layer w6: U4.21@-649.61,2366.73 -649.61,2371.15 -640.98,2379.78 -640.98,2407.86 ; -641,2407.88 -641,2484.98 v2(-633.86,2492.13) ; v3(430.51,2380.51) 431.01,2380 493.37,2380 503.37,2370 505.3,2368.06 505.59,2367.75 524.63,2345.83 U6.2@607.4,2345.83
  Mid-Layer 2 w6: v2(-633.86,2492.13) -633.86,2571.85 -950.52,2571.85 -956.38,2577.71 -956.38,3879.97 -950.52,3885.83 -547.04,3885.83 -541.18,3891.68 -541.18,4338.82 -259.9,4620.1 -259.9,4703.28 -246.06,4717.11 J1.22@-246.06,4730.71
  Bottom Layer w6: J1.22@-246.06,4730.71 -165.35,4650 1000,4650 1061.02,4588.98 1061.02,2491.31 854.16,2284.45 779.5,2284.45 715.05,2220 590,2220 510,2300 480,2300 470,2310 470,2350 442.94,2377.06 433.95,2377.06 v3(430.51,2380.51)
NetJ1_23: J1.23 U4.2 U6.21 | length 7258.4
  Top Layer w6: v2(-684.06,2182.09) -652.91,2213.23 U4.2@-652.91,2300.32 ; U6.21@673.82,2342.52 680.96,2342.52 690.75,2332.72 827.28,2332.72 v3(830,2330)
  Mid-Layer 2 w6: v2(-684.06,2182.09) -984.25,2482.28 -984.25,3909.5 -978.24,3915.51 -576.72,3915.51 -570.87,3921.37 -570.87,4359.13 -346.06,4583.94 J1.23@-346.06,4730.71
  Bottom Layer w6: J1.23@-355.31,4721.46 J1.23@-346.06,4730.71 -245.35,4630 990.95,4630 1033.15,4587.8 1033.15,2533.15 v3(830,2330)
NetJ1_24: J1.24 U1.21 U8.9 | length 10435.6
  Top Layer w6: U1.21@-472.44,890.35 -472.44,894.18 -465,901.62 -465,991.99 -463.1,993.88 -463.1,1001.9 v2(-459.47,1005.53) ; U8.9@514.65,869.45 525.45,869.45 525.53,869.53 706.47,869.53 798,778 v2(850,778)
  Mid-Layer 1 w6: J1.24@-446.06,4730.71 -446.06,4383.07 -118.05,4055.06 1042.55,4055.06 1046.06,4051.55 1046.06,946.65 878.07,778.66 850.66,778.66 v2(850,778)
  Mid-Layer 2 w6: v2@-459.5,1005.56 -459.5,1049.5 -475.06,1065.06 -475.06,1224.77 -620.23,1369.94 -894.57,1369.94 -1024.76,1500.13 -1024.76,4063.89 -1007.95,4080.71 -608.22,4080.71 -602.36,4086.57 -602.36,4377.64 -446.06,4533.94 J1.24@-446.06,4730.71
NetJ1_25: J1.25 U1.2 U8.16 | length 11329.5
  Top Layer w6: U1.2@-475.75,823.94 -475.75,679.49 v2(-474.41,678.15) ; v2(310,843.95) 314.3,843.95 327.35,857 437.5,857 446.64,866.14 U8.16@448.23,866.14
  Mid-Layer 1 w6: J1.25@-546.06,4730.71 -546.06,4439.76 -141.49,4035.19 1013.56,4035.19 1018.19,4030.56 1018.19,1010.34 677.85,670 440,670 310,800 v2(310,843.95)
  Mid-Layer 2 w6: J1.25@-546.06,4730.71 -546.06,4483.94 -633.86,4396.14 -633.86,4115.11 -639.72,4109.25 -1018.82,4109.25 -1052.64,4075.44 -1052.64,710.35 -1022.29,680 -476.26,680 v2(-474.41,678.15)
NetJ5_1: J5.1 U6.11 | length 2010.7
  Top Layer w6: U6.11@680.55,2373.46 700.79,2393.7
  Top Layer w19.5: 700.79,2393.7 750.24,2443.15 ccw(c679.53,2513.86) 779.53,2513.86 J5.1@779.53,4347.44
NetJ10_1: J10.1 U4.11 | length 2022.6
  Top Layer w6: -701.04,2393.96 U4.11@-680.55,2373.46
  Top Layer w19.5: J10.1@-763.78,4367.13 -763.78,2502.64 ccw(c-663.78,2502.64) -734.49,2431.93 -701.04,2393.96
NetR1_2: R1.2 U1.14 | length 881.7
  Top Layer w6: -527.56,811.02 U1.14@-503.39,835.2
  Top Layer w19.5: -527.56,811.02 -537.64,800.94 ccw(c-466.93,730.23) -566.93,730.23 -566.93,431.68 ccw(c-466.93,431.68) -537.64,360.97 -422.5,245.82 ccw(c-351.79,316.54) -351.79,216.54 -215.55,216.54
NetR2_1: R2.1 U1.4 | length 301.8
  Top Layer w6: U1.4@-441.5,835.2 -417.32,811.02
  Top Layer w19.5: -417.32,811.02 -382.84,776.55 ; -381.89,775.59 -285.19,678.9 ccw(c-214.48,749.61) -214.48,649.61 -210.89,649.61
NetR3_2: R3.2 U1.7 | length 301.8
  Top Layer w6: U1.7@-441.5,897.09 -417.32,921.26
  Top Layer w19.5: -417.32,921.26 -382.84,955.74 ; -381.89,956.69 -285.19,1053.39 cw(c-214.48,982.68) -214.48,1082.68 -210.89,1082.68
NetR4_2: R4.2 U1.11 U4.14 | length 1574.3
  Top Layer w6: -698.33,2293.8 U4.14@-680.55,2311.57 ; -521.65,915.35 U1.11@-503.39,897.09
  Top Layer w19.5: -698.33,2293.8 -765.99,2226.14 ccw(c-695.28,2155.43) -795.28,2155.43 -795.28,1614.17 -795.28,1230.4 ccw(c-695.28,1230.4) -765.99,1159.69 -521.65,915.35
NetR5_2: R5.2 U2.14 | length 828.9
  Top Layer w6: -519.73,2118.06 U2.14@-503.39,2134.41
  Top Layer w19.5: -520.42,2116.39 -519.73,2118.06 -526.57,2110.24 ccw(c-486.18,2069.84) -543.31,2069.84 -543.31,1769.77 ccw(c-443.31,1769.77) -514.02,1699.06 -360,1545.04 ccw(c-289.29,1615.75) -289.29,1515.75 -215.55,1515.75
NetR6_2: R6.2 U2.4 | length 303.2
  Top Layer w6: U2.4@-441.5,2134.41 -425.47,2118.39
  Top Layer w19.5: -425.47,2118.39 -389.76,2082.68 -362.47,2055.38 -285.19,1978.11 ccw(c-214.48,2048.82) -214.48,1948.82 -210.89,1948.82
NetR7_1: R7.1 U2.7 | length 303.2
  Top Layer w6: U2.7@-441.5,2196.3 -425.47,2212.32
  Top Layer w19.5: -425.47,2212.32 -389.76,2248.03 -362.47,2275.33 -285.19,2352.6 cw(c-214.48,2281.89) -214.48,2381.89 -210.89,2381.89
NetR8_1: R8.1 U2.11 U4.4 | length 163
  Top Layer w6: U4.4@-618.66,2311.57 -599,2291.91 ; -519.68,2212.6 U2.11@-503.39,2196.3
  Top Layer w19.5: -599,2291.91 -561.04,2253.96 -519.68,2212.6
NetR9_1: R9.1 U3.11 U4.7 | length 711.5
  Top Layer w6: U4.7@-618.66,2373.46 -595,2397.13 ; -527.05,2976.89 U3.11@-503.39,3000.55
  Top Layer w19.5: -595,2397.13 -564.29,2427.84 ccw(c-635,2498.55) -535,2498.55 -535,2541.39 -535,2588.58 ccw(c-635,2588.58) -564.29,2659.29 -570.71,2665.71 cw(c-500,2736.42) -600,2736.42 -600,2862.52 cw(c-500,2862.52) -570.71,2933.23 -527.05,2976.89
NetR10_2: R10.2 U3.14 | length 303.9
  Top Layer w6: U3.14@-441.5,3000.55 -421.26,2980.32
  Top Layer w19.5: -421.26,2980.32 -356.38,2915.44 -356.38,2913.09 R10.2@-353.65,2910.35 ; R10.2@-352.47,2911.53 -285.19,2844.25 ccw(c-214.48,2914.96) -214.48,2814.96 -210.89,2814.96
NetR11_2: R11.2 U3.7 | length 849.4
  Top Layer w6: -519.68,3078.74 U3.7@-503.39,3062.44
  Top Layer w19.5: -519.68,3078.74 -526.6,3085.66 cw(c-486.28,3125.98) -543.31,3125.98 -543.31,3466.45 cw(c-443.31,3466.45) -514.02,3537.16 -399.37,3651.81 cw(c-328.66,3581.1) -328.66,3681.1 -216.54,3681.1
NetR12_1: R12.1 U3.4 | length 303.2
  Top Layer w6: U3.4@-441.5,3062.44 -425.47,3078.46
  Top Layer w19.5: -425.47,3078.46 -362.47,3141.47 -285.19,3218.74 cw(c-214.48,3148.03) -214.48,3248.03 -210.89,3248.03
NetR13_2: R13.2 U5.14 | length 849.4
  Top Layer w6: U5.14@503.39,3062.44 519.69,3078.74
  Top Layer w19.5: 216.54,3681.1 328.66,3681.1 cw(c328.66,3581.1) 399.37,3651.81 514.02,3537.16 cw(c443.31,3466.45) 543.31,3466.45 543.31,3363 543.31,3125.98 cw(c486.28,3125.98) 526.6,3085.66 ; 519.69,3078.74 526.6,3085.66
NetR14_1: R14.1 U5.4 | length 303.2
  Top Layer w6: 425.47,3078.46 U5.4@441.5,3062.44
  Top Layer w19.5: 210.89,3248.03 214.48,3248.03 cw(c214.48,3148.03) 285.19,3218.74 362.47,3141.47 425.47,3078.46
NetR15_1: R15.1 U7.4 | length 303.2
  Top Layer w6: 425.47,2118.39 U7.4@441.5,2134.41
  Top Layer w19.5: 210.89,1948.82 214.48,1948.82 ccw(c214.48,2048.82) 285.19,1978.11 362.47,2055.38 425.47,2118.39
NetR16_2: R16.2 U5.11 U6.14 | length 711.5
  Top Layer w6: U5.11@503.39,3000.55 527.05,2976.89 ; 595,2397.13 U6.14@618.66,2373.46
  Top Layer w19.5: 527.05,2976.89 570.71,2933.23 cw(c500,2862.52) 600,2862.52 600,2758 600,2736.42 cw(c500,2736.42) 570.71,2665.71 564.29,2659.29 ccw(c635,2588.58) 535,2588.58 535,2541.39 535,2498.55 ccw(c635,2498.55) 564.29,2427.84 595,2397.13
NetR17_2: R17.2 U7.14 | length 303.2
  Top Layer w6: 425.47,2212.32 U7.14@441.5,2196.3
  Top Layer w19.5: 210.89,2381.89 214.48,2381.89 cw(c214.48,2281.89) 285.19,2352.6 362.47,2275.33 425.47,2212.32
NetR18_2: R18.2 U7.7 | length 828.9
  Top Layer w6: U7.7@503.39,2134.41 519.73,2118.06
  Top Layer w19.5: 215.55,1515.75 289.29,1515.75 ccw(c289.29,1615.75) 360,1545.04 514.02,1699.06 ccw(c443.31,1769.77) 543.31,1769.77 543.31,1907 543.31,1997 543.31,2069.84 ccw(c486.18,2069.84) 526.57,2110.24 519.73,2118.06 520.42,2116.39
NetR19_2: R19.2 U8.7 | length 884.5
  Top Layer w6: U8.7@503.39,835.2 521.65,816.93
  Top Layer w19.5: 215.55,216.54 351.79,216.54 ccw(c351.79,316.54) 422.5,245.82 537.64,360.97 ccw(c466.93,431.68) 566.93,431.68 566.93,566.93 566.93,730.17 566.93,730.23 ccw(c466.93,730.23) 537.61,800.98 519.69,818.9
NetR20_1: R20.1 U6.4 U7.11 | length 163
  Top Layer w6: U7.11@503.39,2196.3 525.59,2218.5 ; 599.41,2292.32 U6.4@618.66,2311.57
  Top Layer w19.5: 525.59,2218.5 599.41,2292.32
NetR21_1: R21.1 U6.7 U8.11 | length 1574.3
  Top Layer w6: U8.11@503.39,897.09 521.65,915.35 ; U6.7@680.55,2311.57 698.33,2293.8
  Top Layer w19.5: 521.65,915.35 765.99,1159.69 ccw(c695.28,1230.4) 795.28,1230.4 795.28,1597 795.28,2155.43 ccw(c695.28,2155.43) 765.99,2226.14 698.33,2293.8
NetR22_2: R22.2 U8.14 | length 303.2
  Top Layer w6: 425.47,913.11 U8.14@441.5,897.09
  Top Layer w19.5: 210.89,1082.68 214.48,1082.68 cw(c214.48,982.68) 285.19,1053.39 334.79,1003.79 362.47,976.11 425.47,913.11